# EAGLE board 8x8_dot_matrix_3color_led_display (EAGLE 5.10)
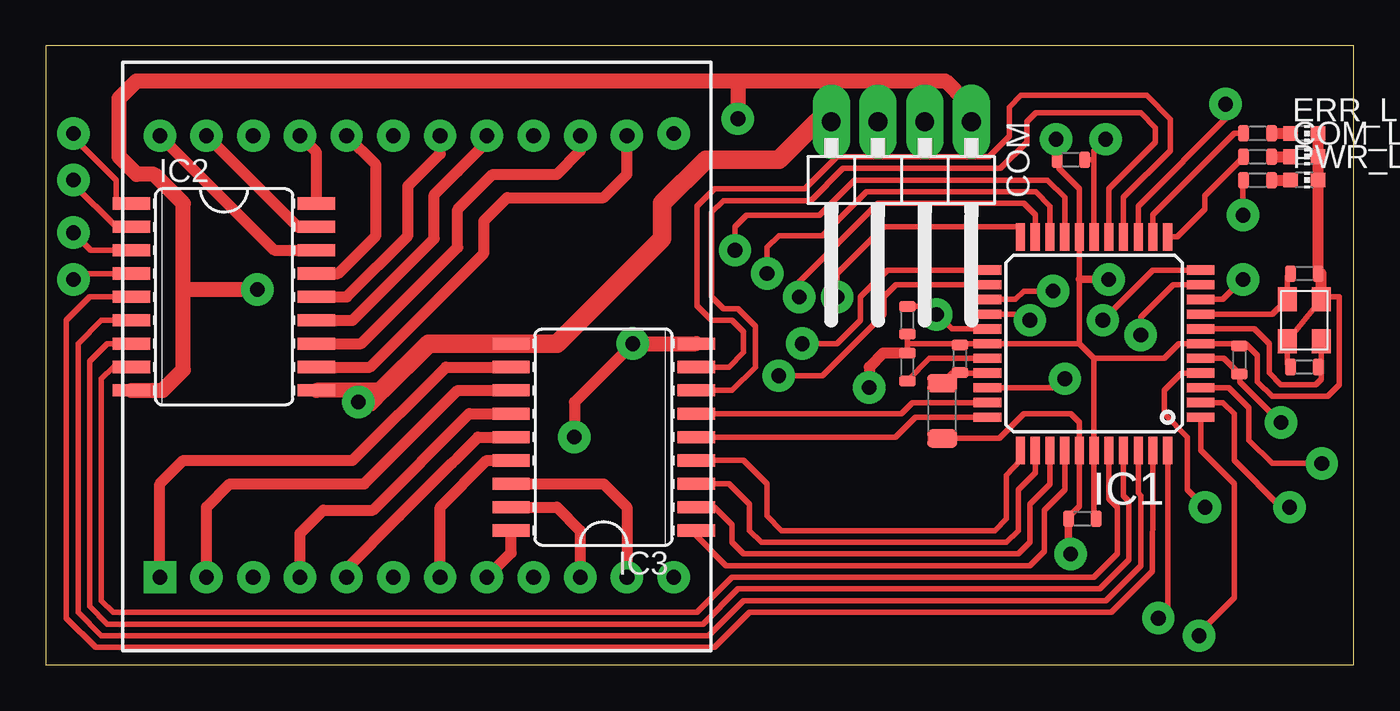
[diagram p0: board, top side]
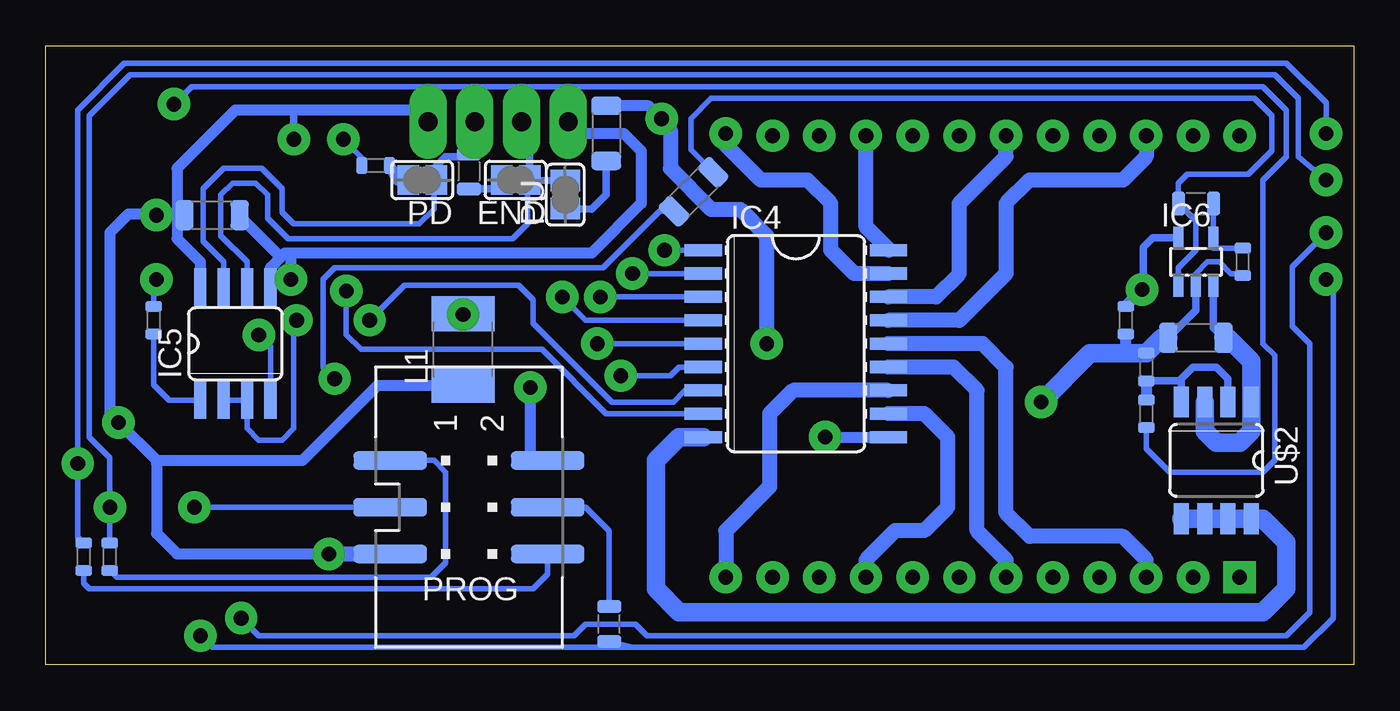
[diagram p1: board, bottom side, seen from below]

Size 71.1 x 33.64 mm. Coordinates in mm from the lower left corner, seen from the top.
Outline: 0,0 71.1,0 71.1,33.64 0,33.64 0,0
Copper layers (1*16): Top 0.035mm / dielectric 1.5mm / Bottom 0.035mm
Design rules "default *": minimum track width 10mil, minimum drill 24mil, track to track 8mil, track to pad 8mil, pad to pad 8mil, via to via 8mil, smd to smd 0mil, copper to edge 20mil, drill to drill 8mil, minimum pad ring 10mil, minimum via ring 8mil, stop-mask expansion 4mil, vias tented up to drill 0mil, thermal gap 10mil

## Footprints (pad centres in the part's own frame; a part is rotated, then mirrored left to right if it is on the bottom)
SMD1206 = smd 1 x 1.65: 1 -1.5,0; 2 1.5,0
SMD0603 = smd 0.6 x 0.9: 1 -0.75,0; 2 0.75,0
1X04/90 = drill 1.016 long: 1 -3.81,-3.81; 2 -1.27,-3.81; 3 1.27,-3.81; 4 3.81,-3.81
CHIP-LED0603 = smd 0.8 x 0.8: A 0,-0.75; C 0,0.75
SJ = smd 1.168 x 1.6: 1 -0.762,0; 2 0.762,0
TQFP44 = smd 1.5 x 0.5: 1 -5.8,4; 2 -5.8,3.2; 3 -5.8,2.4; 4 -5.8,1.6; 5 -5.8,0.8; 6 -5.8,0; 7 -5.8,-0.8; 8 -5.8,-1.6; 9 -5.8,-2.4; 10 -5.8,-3.2; 11 -5.8,-4; 23 5.8,-4; 24 5.8,-3.2; 25 5.8,-2.4; 26 5.8,-1.6; 27 5.8,-0.8; 28 5.8,0; 29 5.8,0.8; 30 5.8,1.6; 31 5.8,2.4; 32 5.8,3.2; 33 5.8,4 | smd 0.5 x 1.5: 12 -4,-5.8; 13 -3.2,-5.8; 14 -2.4,-5.8; 15 -1.6,-5.8; 16 -0.8,-5.8; 17 0,-5.8; 18 0.8,-5.8; 19 1.6,-5.8; 20 2.4,-5.8; 21 3.2,-5.8; 22 4,-5.8; 34 4,5.8; 35 3.2,5.8; 36 2.4,5.8; 37 1.6,5.8; 38 0.8,5.8; 39 0,5.8; 40 -0.8,5.8; 41 -1.6,5.8; 42 -2.4,5.8; 43 -3.2,5.8; 44 -4,5.8
SO18W = smd 0.66 x 2.032: 1 -5.08,-5.029; 2 -3.81,-5.029; 3 -2.54,-5.029; 4 -1.27,-5.029; 5 0,-5.029; 6 1.27,-5.029; 7 2.54,-5.029; 8 3.81,-5.029; 9 5.08,-5.029; 10 5.08,5.029; 11 3.81,5.029; 12 2.54,5.029; 13 1.27,5.029; 14 0,5.029; 15 -1.27,5.029; 16 -2.54,5.029; 17 -3.81,5.029; 18 -5.08,5.029
SO08 = smd 0.66 x 2.032: 1 -1.905,-3.073; 2 -0.635,-3.073; 3 0.635,-3.073; 4 1.905,-3.073; 5 1.905,3.073; 6 0.635,3.073; 7 -0.635,3.073; 8 -1.905,3.073
SOT23-5 = smd 0.55 x 1.2: 1 -0.95,-1.3; 2 0,-1.3; 3 0.95,-1.3; 4 0.95,1.3; 5 -0.95,1.3
L1812 = smd 1.9 x 3.4: 1 -1.95,0; 2 1.95,0
ML6SMD = smd 1 x 4: 1 -2.54,-4.28; 2 -2.54,4.28; 3 0,-4.28; 4 0,4.28; 5 2.54,-4.28; 6 2.54,4.28
ABM8 = smd 1.3 x 1.05: GND$1 -1.15,0.925; GND$2 1.15,-0.925; Q$1 -1.15,-0.925; Q$2 1.15,0.925
SMD0805 = smd 0.7 x 1.3: 1 -0.95,0; 2 0.95,0
32MM = drill 0.8 round: C1 5.08,24; C2 12.7,24; C3 20.32,24; C4 27.94,24.13; C5 5.08,0; C6 12.7,0; C7 20.32,0; C8 27.94,0; G1 2.54,24; G2 10.16,24; G3 17.78,24; G4 25.4,24; G5 2.54,0; G6 10.16,0; G7 17.78,0; G8 25.4,0; R1 0,24; R2 7.62,24; R3 15.24,24; R4 22.86,24; R6 7.62,0; R7 15.24,0; R8 22.86,0 | drill 0.8 square: R5 0,0
SO8 = smd 0.813 x 1.676: D1A -1.905,3.175; D1B -0.635,3.175; D2A 0.635,3.175; D2B 1.905,3.175; G1 -0.635,-3.175; G2 1.905,-3.175; S1 -1.905,-3.175; S2 0.635,-3.175

## Placement (x,y rotation side)
C1  100nF  [SMD1206]  62.07,24.45 0 bottom
C2  100nF  [SMD0603]  64.9,16.57 90 top
C3  100nF  [SMD0603]  55.72,27.46 180 top
C4  100nF  [SMD0603]  56.36,7.94 0 top
C5  100nF  [SMD0603]  46.83,16.19 270 top
C6  100nF  [SMD0603]  46.83,18.73 90 top
C7  18pF  [SMD0603]  68.42,21.27 180 top
C8  18pF  [SMD0603]  68.42,16.19 0 top
C9  100nF  [SMD0603]  12.38,18.73 270 bottom
COM  [1X04/90]  46.51,25.72 180 top
COM_LED  yellow  [CHIP-LED0603]  68.42,27.62 270 top
END  [SJ]  45.56,26.35 180 bottom
ERR_LED  red  [CHIP-LED0603]  68.42,28.89 270 top
IC1  MEGA16-A  [TQFP44]  56.99,17.46 180 top
IC2  UDN2984LW  [SO18W]  9.68,20 270 top
IC3  UDN2984LW  [SO18W]  30.32,12.38 90 top
IC4  ULN2803  [SO18W]  30.32,17.46 270 bottom
IC5  MAX481CSA  [SO08]  60.8,17.46 0 bottom
IC6  AD8031RJ  [SOT23-5]  8.57,21.91 0 bottom
L1  10uH  [L1812]  48.42,17.15 90 bottom
PD  [SJ]  50.64,26.35 180 bottom
PROG  ML6_SMD  [ML6SMD]  48.1,8.57 270 bottom
PU  [SJ]  42.86,25.56 90 bottom
PWR_LED  green  [CHIP-LED0603]  68.42,26.35 270 top
Q1  16MHz  [ABM8]  68.42,18.73 90 top
R1  150R  [SMD0603]  11.27,13.65 90 bottom
R2  10k  [SMD0603]  11.27,16.19 270 bottom
R3  120R  [SMD0805]  48.1,26.83 270 bottom
R4  1k  [SMD1206]  40.64,28.89 270 bottom
R5  1k  [SMD0603]  53.18,27.15 0 bottom
R6  1k  [SMD0603]  65.25,18.73 270 bottom
R7  20m  [SMD1206]  8.57,17.78 180 bottom
R8  200k  [SMD0805]  8.57,25.08 0 bottom
R9  1k  [SMD0603]  6.03,21.91 90 bottom
R10  10k  [SMD1206]  48.74,13.81 90 top
R11  10k  [SMD0603]  49.69,16.64 90 top
R12  1k  [SMD0603]  65.88,27.62 0 top
R13  1k  [SMD0603]  65.88,28.89 0 top
R14  1k  [SMD0603]  65.88,26.35 0 top
R15  1k  [SMD0805]  40.48,2.22 90 bottom
R16  1k  [SMD0603]  69.06,5.87 90 bottom
R17  1k  [SMD0603]  67.63,5.87 90 bottom
R18  1k  [SMD1206]  35.88,25.72 225 bottom
U$1  32MM  [32MM]  6.19,4.76 0 top
U$2  CEM9926  [SO8]  7.46,11.11 180 bottom

## Library data of the parts
C1-C9 R1-R18 = 0_pasive
COM = pinhead
COM_LED ERR_LED PWR_LED = led
END PD PU = jumper
IC1 = atmel
IC2-IC4 = uln-udn
IC5 = maxim
IC6 = analog-devices
L1 = rcl
PROG = 0_con
Q1 = crystal
U$1 = displayled8x8
U$2 = unipolartransistor

## Nets
+5V: C1.1 C2.1 C3.1 C4.1 C9.1 COM.1 IC1.5 IC1.17 IC1.38 IC2.9 IC3.9 IC4.10 IC5.8 IC6.5 L1.1 PROG.5 R4.1 R10.1 R14.1
BRIGHTNESS: IC1.14 R1.1
C1: IC1.22 IC4.4
C2: IC1.21 IC4.3
C3: IC1.19 IC4.1
C4: IC1.20 IC4.2
C5: IC1.23 IC4.5
C6: IC1.24 IC4.6
C7: IC1.25 IC4.8
C8: IC1.26 IC4.7
COM_LED: IC1.12 R12.1
CURRENT: IC1.31 R18.2
ERR_LED: IC1.13 R13.1
G1: IC1.2 IC2.2 R17.2
G2: IC1.44 IC2.3
G3: IC1.42 IC2.6
G4: IC1.40 IC2.8
G5: IC1.16 IC3.7
G6: IC1.33 IC3.5
G7: IC1.37 IC3.1
G8: IC1.35 IC3.3
GND: C1.2 C2.2 C3.2 C4.2 C5.1 C6.1 C7.1 C8.1 C9.2 COM.4 COM_LED.C ERR_LED.C IC1.6 IC1.18 IC1.28 IC1.39 IC2.10 IC3.10 IC5.5 IC6.2 PROG.2 PWR_LED.C Q1.GND$1 Q1.GND$2 R2.1 R5.1 R7.2 R9.1 R11.2
MISO: PROG.1 R17.1
MOSI: PROG.4 R15.2
N$1: IC6.3 R7.1 U$2.S1 U$2.S2
N$2: IC6.4 R8.2 R9.2
N$3: IC6.1 R8.1 R18.1
N$25: IC4.9 U$2.D1A U$2.D1B U$2.D2A U$2.D2B
N$26: R1.2 R2.2 U$2.G1 U$2.G2
N$27: END.2 R3.2
N$28: COM.3 END.1 IC5.6 PU.2
N$29: COM.2 IC5.7 PD.1 R3.1
N$30: PU.1 R4.2
N$31: PD.2 R5.2
N$32: IC5.1 R6.2
N$33: IC1.11 IC5.2 IC5.3
N$34: IC1.10 IC5.4
N$35: IC1.9 R6.1
N$37: PWR_LED.A R14.2
N$40: IC1.30 R10.2 R11.1
N$41: COM_LED.A R12.2
N$42: ERR_LED.A R13.2
N$44: C6.2 IC1.27 L1.2
N$45: C5.2 IC1.29
N$46: C8.2 IC1.7 Q1.Q$1
N$47: C7.2 IC1.8 Q1.Q$2
PC1: IC4.15 U$1.C1
PC2: IC4.16 U$1.C2
PC3: IC4.18 U$1.C3
PC4: IC4.17 U$1.C4
PC5: IC4.14 U$1.C5
PC6: IC4.13 U$1.C6
PC7: IC4.11 U$1.C7
PC8: IC4.12 U$1.C8
PG1: IC2.17 U$1.G1
PG2: IC2.15 U$1.G2
PG3: IC2.13 U$1.G3
PG4: IC2.11 U$1.G4
PG5: IC3.12 U$1.G5
PG6: IC3.14 U$1.G6
PG7: IC3.18 U$1.G7
PG8: IC3.16 U$1.G8
PR1: IC2.16 U$1.R1
PR2: IC2.18 U$1.R2
PR3: IC2.14 U$1.R3
PR4: IC2.12 U$1.R4
PR5: IC3.11 U$1.R5
PR6: IC3.13 U$1.R6
PR7: IC3.15 U$1.R7
PR8: IC3.17 U$1.R8
R1: IC1.1 IC2.4 R15.1
R2: IC1.3 IC2.1 R16.2
R3: IC1.43 IC2.5
R4: IC1.41 IC2.7
R5: IC1.15 IC3.8
R6: IC1.32 IC3.6
R7: IC1.34 IC3.4
R8: IC1.36 IC3.2
RESET: IC1.4 PROG.3
SCK: PROG.6 R16.1

## Tracks (layer width: path | path; a pad name or v marks a point on that pad's centre or on a via)
+5V  (via drill 0.8)
  Top 0.305: 56.36,27.51 C3.1 56.83,27.46 arc-90 56.99,27.31 | v67.15,13.18 64.93,15.4 64.93,15.79 | 55.61,8.04 56.19,8.62 IC1.38 56.19,13.18 55.72,13.65 53.18,13.65 51.84,12.31 R10.1 | R14.1 65.09,26.35 v65.09,24.45 | IC1.5 64.06,16.66 C2.1 | 56.99,27.31 56.99,27.94 v57.63,28.58 | 56.99,27.31 IC1.17
  Top 0.406: v55.72,6.03 55.61,6.15 C4.1 55.61,8.04
  Top 0.61: 64.93,15.79 C2.1 | v28.73,12.38 28.73,14.29 v31.91,17.46 | v67.15,13.18
  Top 0.813: IC2.9 6.35,14.92 7.46,16.03 7.46,20.41 | 37.62,31.75 4.92,31.75 3.97,30.8 3.97,27.62 4.92,26.67 5.87,26.67 7.46,25.08 7.46,20.41 | 37.62,31.75 48.89,31.75 50.01,30.64 50.32,30.32 COM.1 | 7.46,20.41 v11.5,20.41 | v31.91,17.46 IC3.9 | 37.62,31.75 v37.62,29.69
  Bottom 0.406: IC6.5 10.92,23.21 11.43,22.7 11.43,20.48 v11.5,20.41 | 57.63,30.16 v57.63,28.58
  Bottom 0.61: COM.1 50.96,30.16 57.63,30.16 60.8,30.16 63.98,26.99 63.98,24.77 | v67.15,13.18 67.63,13.65 67.63,23.5 66.62,24.51 65.14,24.51 v65.09,24.45 C1.1 63.66,24.45 63.98,24.77 | 65.09,10.95 65.09,7.14 63.98,6.03 v55.72,6.03 | v67.15,13.18 | v67.15,13.18 65.09,11.11 65.09,10.95 | L1.1 53.07,15.2 57.15,11.11 64.93,11.11 65.09,10.95 | C9.1 12.38,19.53 v11.5,20.41 | R4.1 38.33,30.39 v37.62,29.69 | v28.73,12.38 IC4.10 | 63.98,24.77 63.98,23.18 62.71,21.91 IC5.8
  Bottom 0.813: v55.72,6.03 PROG.5 | v31.91,17.46 31.91,23.34 33.34,24.77 34.92,24.77 37.15,26.99 37.15,29.05 v37.62,29.69
BRIGHTNESS  (via drill 0.8)
  Top 0.305: IC1.14 59.39,24.94 64.29,29.85 64.29,30.32 v64.13,30.48
  Bottom 0.305: R1.1 11.27,11.75 10,10.48 4.92,10.48 4.29,11.11 4.29,16.83 4.92,17.46 4.92,26.35 3.65,27.62 3.65,30.16 4.92,31.43 63.18,31.43 v64.13,30.48 | v64.13,30.48
C1  (via drill 0.8)
  Top 0.305: v43.02,20 43.02,21.27 45.56,23.81 52.99,23.81 IC1.22
  Bottom 0.305: IC4.4 41.75,18.73 v43.02,20
C2  (via drill 0.8)
  Top 0.305: IC1.21 53.79,24.47 53.18,25.08 45.24,25.08 40.96,20.8 v40.96,20
  Bottom 0.305: IC4.3 v40.96,20
C3  (via drill 0.8)
  Top 0.305: IC1.19 55.39,25.41 54.45,26.35 43.97,26.35 42.07,24.45 38.1,24.45 37.46,23.81 v37.46,22.54
  Bottom 0.305: IC4.1 v37.46,22.54
C4  (via drill 0.8)
  Top 0.305: IC1.20 54.59,24.94 53.82,25.72 44.61,25.72 42.23,23.34 39.85,23.34 39.21,22.7 v39.21,21.27
  Bottom 0.305: IC4.2 v39.21,21.27
C5  (via drill 0.8)
  Top 0.305: IC1.23 45.75,21.46 44.29,20 44.29,18.73 43.02,17.46 v41.12,17.46
  Bottom 0.305: v41.12,17.46 IC4.5
C6  (via drill 0.8)
  Top 0.305: IC1.24 46.22,20.66 45.56,20 45.56,19.05 42.23,15.72 v39.85,15.72
  Bottom 0.305: v39.85,15.72 37.15,15.72 36.67,16.19 IC4.6
C7  (via drill 0.8)
  Top 0.305: IC1.25 52.72,19.86 53.18,20.32 v54.77,20.32
  Bottom 0.305: v54.77,20.32 54.77,17.94 53.97,17.15 44.13,17.15 40.64,13.65 IC4.8
C8  (via drill 0.8)
  Top 0.305: IC1.26 53.17,19.06 v53.5,18.73
  Bottom 0.305: IC4.7 36.35,14.92 36.99,14.29 40.32,14.29 44.61,18.57 44.61,19.84 45.4,20.64 51.59,20.64 v53.5,18.73
COM_LED
  Top 0.305: IC1.12 61.52,23.26 63.02,24.77 63.02,25.52 R12.1
CURRENT  (via drill 0.8)
  Top 0.305: IC1.31 54.95,15.06 v55.4,15.56
  Bottom 0.305: v55.4,15.56 56.04,16.19 56.04,20.96 55.4,21.59 40.8,21.59 37.73,24.66 R18.2
ERR_LED
  Top 0.305: IC1.13 60.19,24.47 64.61,28.89 R13.1
G1  (via drill 0.8)
  Top 0.305: v67.63,8.57 67.15,8.57 64.61,11.11 64.61,13.65 64,14.26 IC1.2 | IC2.2 3.81,23.81 1.49,26.13 v1.49,26.35
  Bottom 0.305: R17.2 v67.63,8.57 67.63,11.27 68.74,12.38 68.74,29.85 66.52,32.07 4.29,32.07 3.02,30.8 3.02,27.62 v1.49,26.35
G2  (via drill 0.8)
  Top 0.305: IC1.44 60.99,3.05 v60.48,2.54 | IC2.3 2.45,22.54 v1.49,23.5
  Bottom 0.305: v60.48,2.54 59.53,1.59 42.39,1.59 41.75,2.22 39.05,2.22 38.42,1.59 3.65,1.59 2.38,2.86 2.38,17.46 3.33,18.42 3.33,21.66 v1.49,23.5
G3
  Top 0.305: IC1.42 59.39,9.35 59.53,9.21 59.53,5.4 57.63,3.49 37.94,3.49 36.04,1.59 3.02,1.59 1.75,2.86 1.75,17.46 3.02,18.73 IC2.6
G4
  Top 0.305: IC1.40 57.79,9.04 58.26,8.57 58.26,6.03 56.99,4.76 37.31,4.76 35.4,2.86 3.65,2.86 3.02,3.49 3.02,15.56 3.65,16.19 IC2.8
G5
  Top 0.305: IC3.7 37.31,14.92 38.58,16.19 38.58,18.42 37.62,19.37 36.83,19.37 36.19,20 36.19,24.61 36.83,25.24 41.59,25.24 43.34,26.99 51.91,26.99 53.34,28.42 53.34,29.53 53.82,30 | 53.82,30 | 53.82,30 59.53,30 60.33,29.2 60.33,28.42 57.79,25.88 IC1.16
G6
  Top 0.305: IC1.33 47.28,13.46 46.2,12.38 IC3.5
G7
  Top 0.305: IC1.37 55.39,9.51 54.29,8.41 54.29,6.19 53.5,5.4 36.99,5.4 35.35,7.04 IC3.1
G8
  Top 0.305: IC1.35 53.79,10.45 52.86,9.53 52.86,7.3 52.23,6.67 38.89,6.67 38.26,7.3 38.26,8.73 37.15,9.84 IC3.3
GND  (via drill 0.8)
  Top 0.305: 69.35,21.27 C7.1 69.06,21.39 | C8.1 67.5,16.37 Q1.GND$1 Q1.GND$2 69.47,20 70.33,20 70.33,15.24 69.69,14.61 66.67,14.61 65.88,15.4 65.88,16.83 65.25,17.46 64.93,17.46 | 64.93,17.46 IC1.6 61.59,17.46 60.8,16.67 56.99,16.67 | C4.2 56.99,8.05 IC1.39 56.99,16.67 | 49.37,17.46 46.83,17.46 | 49.37,17.46 IC1.28 56.19,17.46 | 46.83,17.46 C6.1 | 46.83,17.46 C5.1 | R11.2 49.45,17.39 49.37,17.46 | 64.93,17.46 C2.2 | 56.19,17.46 56.19,20.96 IC1.18 56.19,25.88 55.09,26.99 55.09,27.51 C3.2 54.97,28.53 v54.93,28.58 | 56.19,17.46 56.2,17.46 56.99,16.67
  Top 0.406: v57.78,20.96 56.19,20.96
  Top 0.61: C5.1 45.52,16.94 44.77,16.19 v44.77,15.08 | ERR_LED.C COM_LED.C PWR_LED.C C7.1 | C7.1 69.17,21.16 69.21,21.11 69.21,21.32 C7.1 | Q1.GND$2 69.35,21.27 | v16.99,14.29 16.99,14.45
  Top 0.813: 18.26,14.92 IC2.10
  Top 1.016: COM.4 41.91,29.53 39.85,27.46 35.88,27.46 33.5,25.08 33.5,23.18 27.78,17.46 IC3.10 20.8,17.46 18.26,14.92 17.62,14.29 v16.99,14.29
  Bottom 0.305: IC6.2 8.57,21.27 7.94,21.91 7.3,21.91 6.67,21.27 6.15,21.27 R9.1 | R5.1 53.93,27.58 v54.93,28.58
  Bottom 0.406: IC6.2 8.57,19.28 R7.2
  Bottom 0.61: COM.4 42.07,28.89 39.69,28.89 38.73,27.94 38.73,25.08 41.43,22.38 57.94,22.38 | v44.77,15.08 44.77,11.11 44.29,11.11 | 44.29,11.11 | 44.29,11.11 PROG.2 | 57.94,22.38 58.1,22.38 58.34,22.15 | C9.2 12.38,17.1 12.22,16.94 | IC5.5 58.9,21.59 58.34,22.15 | v57.78,20.96 57.78,22.23 57.94,22.38 | C1.2 60.57,24.38 58.34,22.15
  Bottom 1.016: v16.99,14.29 14.33,16.94 12.22,16.94 R2.1 10.43,17.78 R7.2
MISO
  Bottom 0.305: R17.1 67.27,4.76 50.16,4.76 49.37,5.56 49.37,10.48 50.01,11.11 PROG.1
MOSI
  Bottom 0.305: R15.2 40.48,7.3 41.75,8.57 PROG.4
N$1
  Bottom 0.406: IC6.3 7.62,18.33 R7.1
  Bottom 1.016: R7.1 6.83,17.78 5.56,16.51 U$2.S1 5.56,12.7 6.19,12.06 7.46,12.06 8.1,12.7 U$2.S2
N$2
  Bottom 0.305: R8.2 IC6.4 7.62,22.66 R9.2
N$3
  Bottom 0.305: R18.1 36.04,28 36.04,29.69 34.92,30.8 5.4,30.8 4.44,29.85 4.44,27.94 5.71,26.67 9.05,26.67 9.52,26.19 R8.1 8.57,24.13 8.57,22.54 9.52,21.59 IC6.1
N$25
  Bottom 1.016: U$2.D2B U$2.D2A U$2.D1B U$2.D1A 4.92,7.94 3.65,6.67 3.65,4.13 4.92,2.86 36.67,2.86 37.94,4.13 37.94,11.11 36.67,12.38 IC4.9
N$26
  Bottom 0.406: U$2.G1 6.83,15.56 7.46,16.19 8.73,16.19 9.37,15.56 | 9.37,15.56 U$2.G2 | R2.2 9.48,15.44 9.37,15.56
  Bottom 0.61: R2.2 R1.2
N$27
  Bottom 0.406: END.2 46.8,25.88 R3.2
N$28
  Bottom 0.305: 44.93,26.23 44.93,23.97 45.72,23.18 57.94,23.18 59.05,24.29 59.05,25.56 59.69,26.19 60.96,26.19 61.59,25.56 61.59,23.34 60.17,21.91 IC5.6
  Bottom 0.406: COM.3 44.8,29.08 END.1 | END.1 PU.2 | 44.93,26.23 END.1
N$29
  Bottom 0.305: 50.01,26.23 50.01,24.77 50.8,23.97 57.63,23.97 58.26,24.61 58.26,25.88 59.37,26.99 59.85,26.99 61.44,26.99 62.55,25.88 62.55,23.02 61.44,21.91 IC5.7
  Bottom 0.406: COM.2 47.78,28.1 R3.1 48.26,27.62 49.37,27.62 49.88,27.12 PD.1 50.01,26.23
N$30
  Bottom 0.406: R4.2 40.64,25.56 41.43,24.77 PU.1
N$31
  Bottom 0.61: PD.2 51.98,26.35 R5.2
N$32
  Bottom 0.305: IC5.1 64.4,14.39 65.25,15.24 R6.2
N$33  (via drill 0.8)
  Top 0.305: IC1.11 60.2,21.46 v57.47,18.73
  Bottom 0.305: v57.47,18.73 57.63,18.57 57.63,12.86 58.26,12.22 59.53,12.22 60.17,12.86 IC5.3 IC5.2
N$34  (via drill 0.8)
  Top 0.305: IC1.10 61.3,20.66 59.53,18.89 v59.53,17.94
  Bottom 0.305: v59.53,17.94 58.9,17.3 IC5.4
N$35  (via drill 0.8)
  Top 0.305: IC1.9 63.99,19.86 v65.09,20.96
  Bottom 0.305: v65.09,20.96 65.25,20.8 R6.1
N$37
  Top 0.61: R14.2 PWR_LED.A
N$40
  Top 0.305: 49.37,15.86 IC1.30 | R11.1 49.4,15.89 49.37,15.86 | 49.37,15.86 49.24,15.86 R10.2
N$41
  Top 0.61: R12.2 COM_LED.A
N$42
  Top 0.61: R13.2 ERR_LED.A
N$44  (via drill 0.8)
  Top 0.305: IC1.27 49.25,18.26 L1.2 | C6.2 48.03,19.48 L1.2 | L1.2 v48.42,19.05
  Bottom 0.305: v48.42,19.05 L1.2
N$45
  Top 0.305: IC1.29 48.05,16.66 C5.2
N$46
  Top 0.305: IC1.7 65.72,18.26 66.52,17.46 66.52,15.88 67.15,15.24 69.06,15.24 69.35,15.53 69.35,16.19 | 69.35,16.19 Q1.Q$1 | 69.35,16.19 C8.2
N$47
  Top 0.305: C7.2 67.5,21.1 Q1.Q$2 66.68,19.06 IC1.8
PC1
  Bottom 0.813: IC4.15 21.43,18.73 18.89,21.27 18.89,25.08 17.62,26.35 12.54,26.35 11.27,27.62 U$1.C1
PC2
  Bottom 0.813: IC4.16 22.7,20 21.43,21.27 21.43,25.08 18.89,27.62 U$1.C2
PC3
  Bottom 0.813: IC4.18 25.24,22.54 26.51,23.81 U$1.C3
PC4
  Bottom 0.813: IC4.17 27.15,21.27 28.42,22.54 28.42,25.08 29.69,26.35 32.23,26.35 34.13,28.26 U$1.C4
PC5
  Bottom 0.813: IC4.14 20.16,17.46 18.89,16.19 18.89,8.26 17.62,6.98 12.54,6.98 11.27,5.71 U$1.C5
PC6
  Bottom 0.813: IC4.13 21.75,16.19 20.48,14.92 20.48,7.3 18.89,5.71 U$1.C6
PC7
  Bottom 0.813: IC4.11 23.34,13.65 22.07,12.38 22.07,8.57 23.34,7.3 24.92,7.3 26.51,5.71 U$1.C7
PC8
  Bottom 0.813: IC4.12 30.48,14.92 31.75,13.65 31.75,9.68 34.13,7.3 U$1.C8
PG1
  Top 0.61: IC2.17 13.68,23.81 U$1.G1
PG2
  Top 0.61: IC2.15 15.87,21.27 17.94,23.34 17.94,27.18 U$1.G2
PG3
  Top 0.61: IC2.13 16.67,18.73 21.11,23.18 21.11,25.56 22.38,26.83 23.97,28.42 U$1.G3
PG4
  Top 0.61: IC2.11 17.62,16.19 23.81,22.38 23.81,24.13 25.08,25.4 30.32,25.4 31.59,26.67 U$1.G4
PG5
  Top 0.61: IC3.12 22.38,14.92 17.3,9.84 10,9.84 8.73,8.57 U$1.G5
PG6
  Top 0.61: IC3.14 23.49,12.38 22.38,11.27 22.07,10.95 19.21,8.1 16.35,5.24 U$1.G6
PG7
  Top 0.61: IC3.18 25.29,6.08 U$1.G7
PG8
  Top 0.61: IC3.16 30.32,9.84 31.59,8.57 U$1.G8
PR1
  Top 0.61: IC2.16 12.41,22.54 U$1.R1
PR2
  Top 0.61: IC2.18 14.71,27.86 U$1.R2
PR3
  Top 0.61: IC2.14 16.35,20 19.68,23.34 19.68,26.04 21.43,27.78 U$1.R3
PR4
  Top 0.61: IC2.12 17.14,17.46 22.38,22.7 22.38,24.77 24.29,26.67 27.78,26.67 29.05,27.94 U$1.R4
PR5
  Top 0.61: U$1.R5 6.19,9.84 7.46,11.11 16.67,11.11 21.75,16.19 IC3.11
PR6
  Top 0.61: IC3.13 23.02,13.65 17.78,8.41 15.08,8.41 13.81,7.14 U$1.R6
PR7
  Top 0.61: IC3.15 23.97,11.11 21.43,8.57 U$1.R7
PR8
  Top 0.61: IC3.17 27.78,8.57 29.05,7.3 U$1.R8
R1  (via drill 0.8, 0.8 pad 1.27)
  Top 0.305: IC1.1 62.79,11.66 64.61,9.84 64.61,3.65 62.79,1.82 v62.71,1.59 | IC2.4 1.81,21.27 v1.49,20.96
  Bottom 0.305: 39.21,0.95 2.7,0.95 1.11,2.54 1.11,20.57 v1.49,20.96 | 39.21,0.95 62.07,0.95 v62.71,1.59 | 39.21,0.95 R15.1
R2  (via drill 0.8)
  Top 0.305: IC1.3 64.31,15.06 65.4,13.97 65.4,12.22 66.67,10.95 v69.37,10.95 | IC2.1 3.81,25.08 3.81,26.35 1.49,28.67 v1.49,28.89
  Bottom 0.305: R16.2 69.37,6.94 v69.37,10.95 69.37,30.16 66.83,32.7 3.65,32.7 1.49,30.55 v1.49,28.89
R3
  Top 0.305: IC1.43 60.19,9.5 60.17,5.08 57.94,2.86 38.26,2.86 36.35,0.95 2.7,0.95 1.11,2.54 1.11,18.73 2.38,20 IC2.5
R4
  Top 0.305: IC1.41 58.59,9.2 58.9,8.89 58.9,5.71 57.31,4.13 37.62,4.13 35.72,2.22 3.33,2.22 2.38,3.17 2.38,16.51 3.33,17.46 IC2.7
R5
  Top 0.305: IC3.8 37.15,16.19 37.94,16.99 37.94,18.1 37.31,18.73 36.19,18.73 35.4,19.53 35.4,24.92 36.35,25.88 41.27,25.88 43.02,27.62 51.28,27.62 52.23,28.58 52.39,28.73 52.39,30.32 53.02,30.96 59.85,30.96 61.13,29.67 61.13,27.95 58.59,25.41 IC1.15
R6
  Top 0.305: IC1.32 47.12,14.26 46.51,13.65 IC3.6
R7
  Top 0.305: IC3.4 37.94,11.11 39.21,9.84 39.21,8.1 40,7.3 51.59,7.3 52.23,7.94 52.23,10.32 52.99,11.11 IC1.34
R8
  Top 0.305: IC1.36 54.59,9.82 53.5,8.73 53.5,6.67 52.86,6.03 37.94,6.03 37.31,6.67 37.31,7.62 36.35,8.57 IC3.2
RESET  (via drill 0.8)
  Top 0.305: IC1.4 61.74,15.86 60.8,14.92 60.8,13.65 62.07,12.38 62.07,9.53 v63.02,8.57
  Bottom 0.305: v63.02,8.57 PROG.3
SCK
  Bottom 0.305: R16.1 69.06,4.45 68.74,4.13 44.61,4.13 43.81,4.92 PROG.6